# Altium PCB IO BOARD CERES V2.PcbDoc
Units mm, origin at the board's own origin, x right, y up, seen from the top; angles counter-clockwise.
Board outline 85.73 x 76.71 mm, 2 copper layers (Top Layer, Bottom Layer), stack 1.671 mm thick; 60 components, 40 nets, 187 pads, 89 vias.
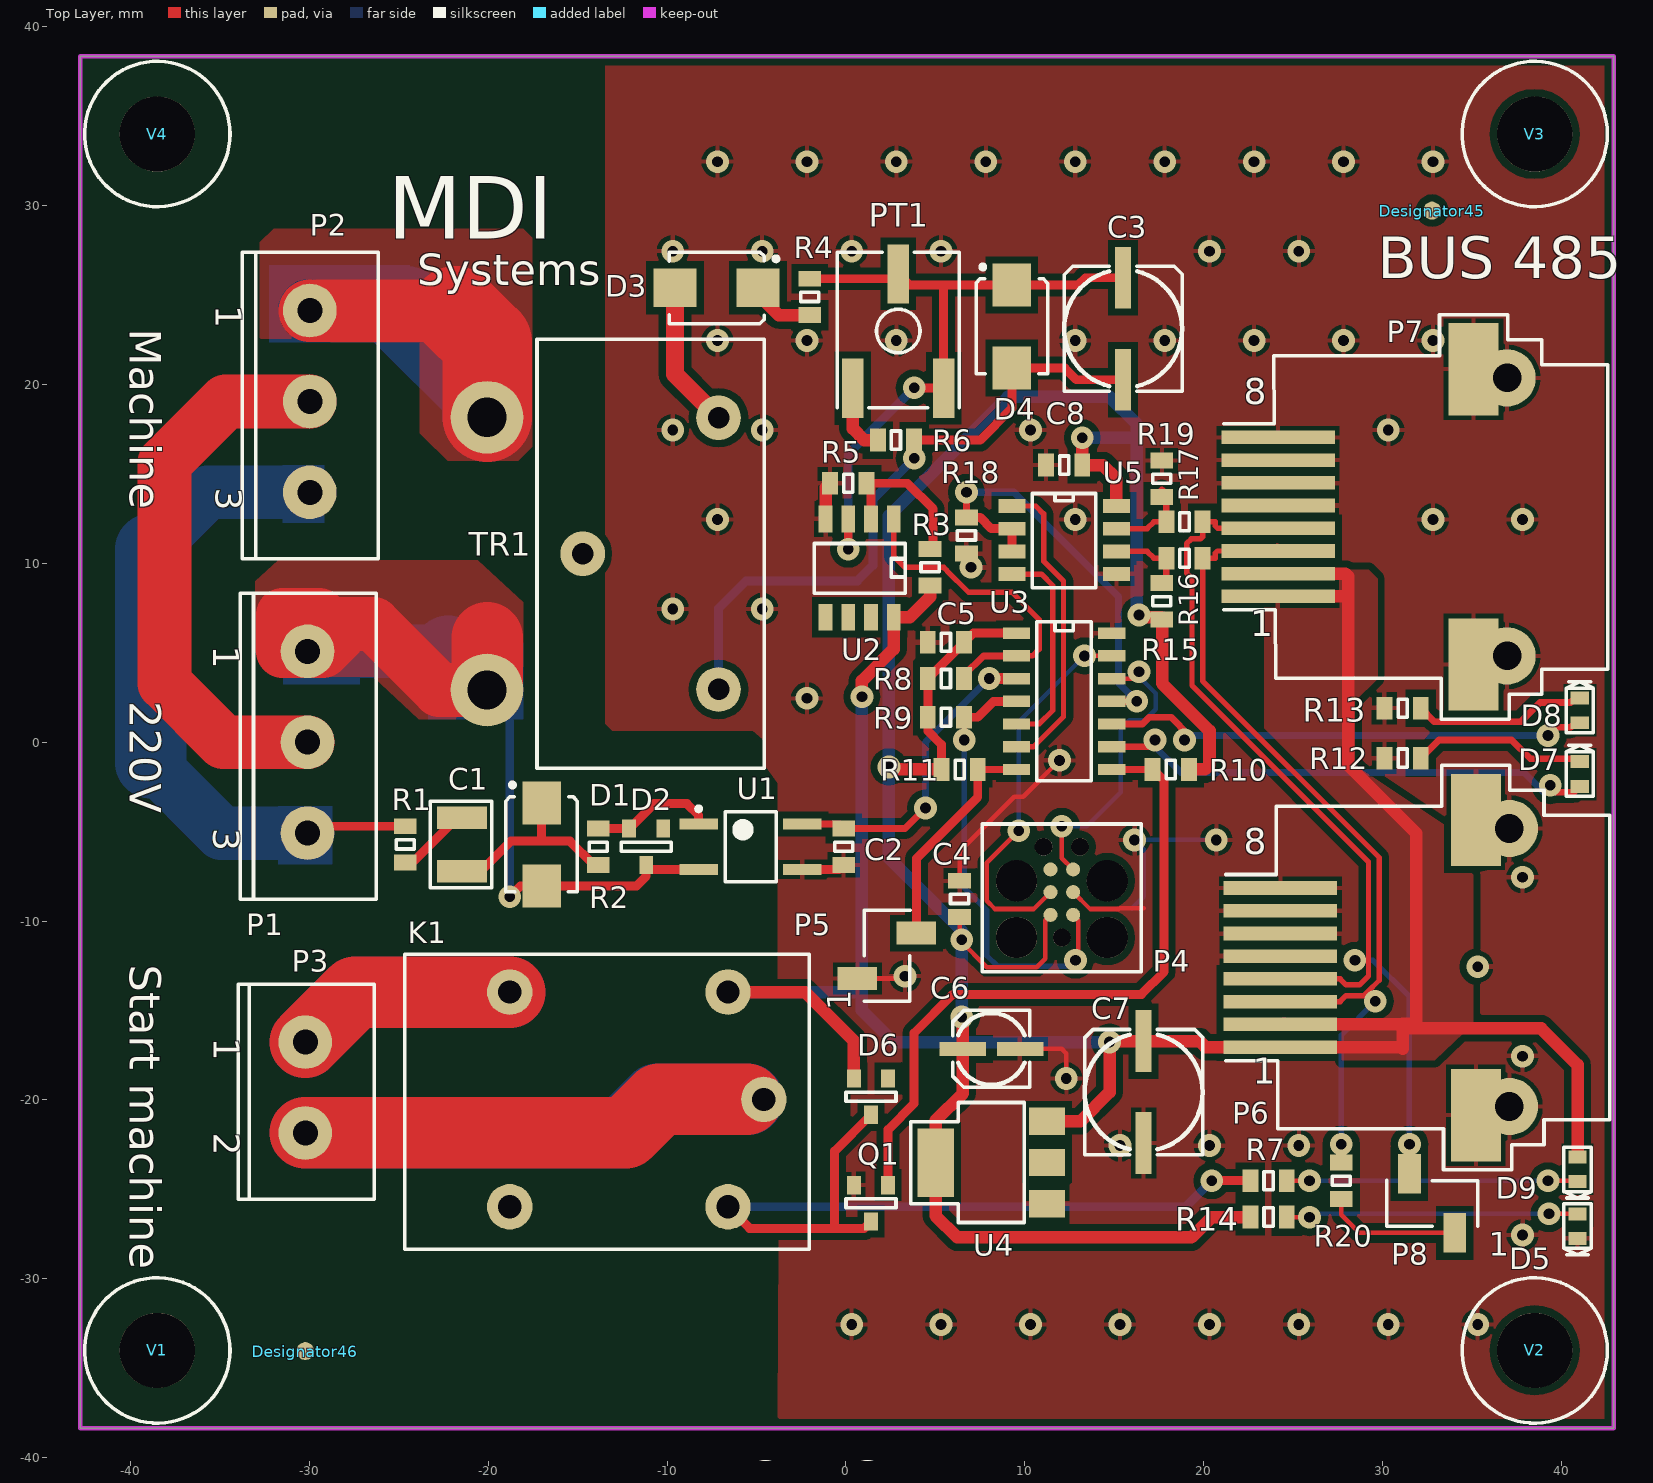
[diagram p0: Top Layer view]
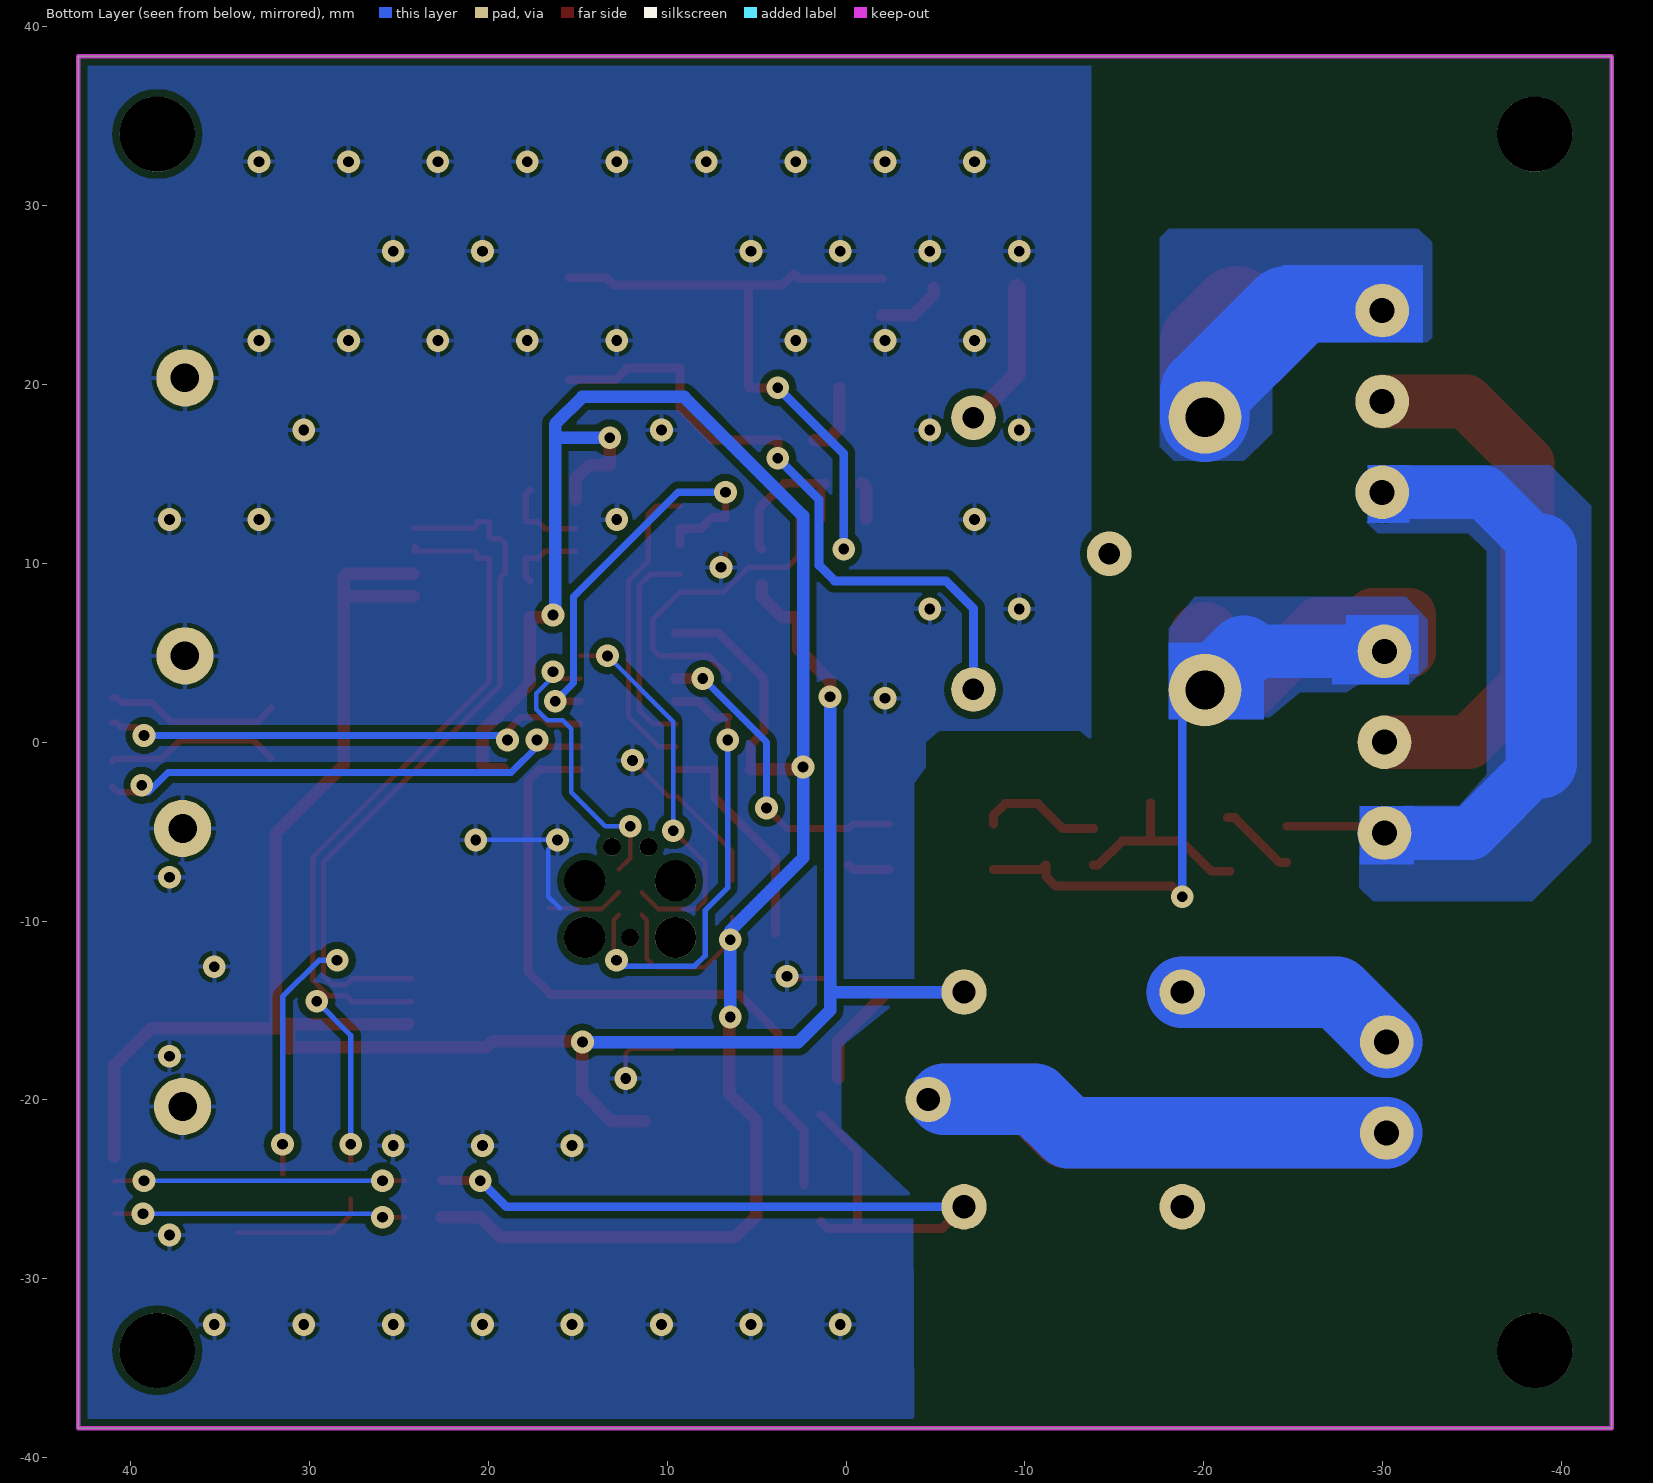
[diagram p1: Bottom Layer view, seen from below]
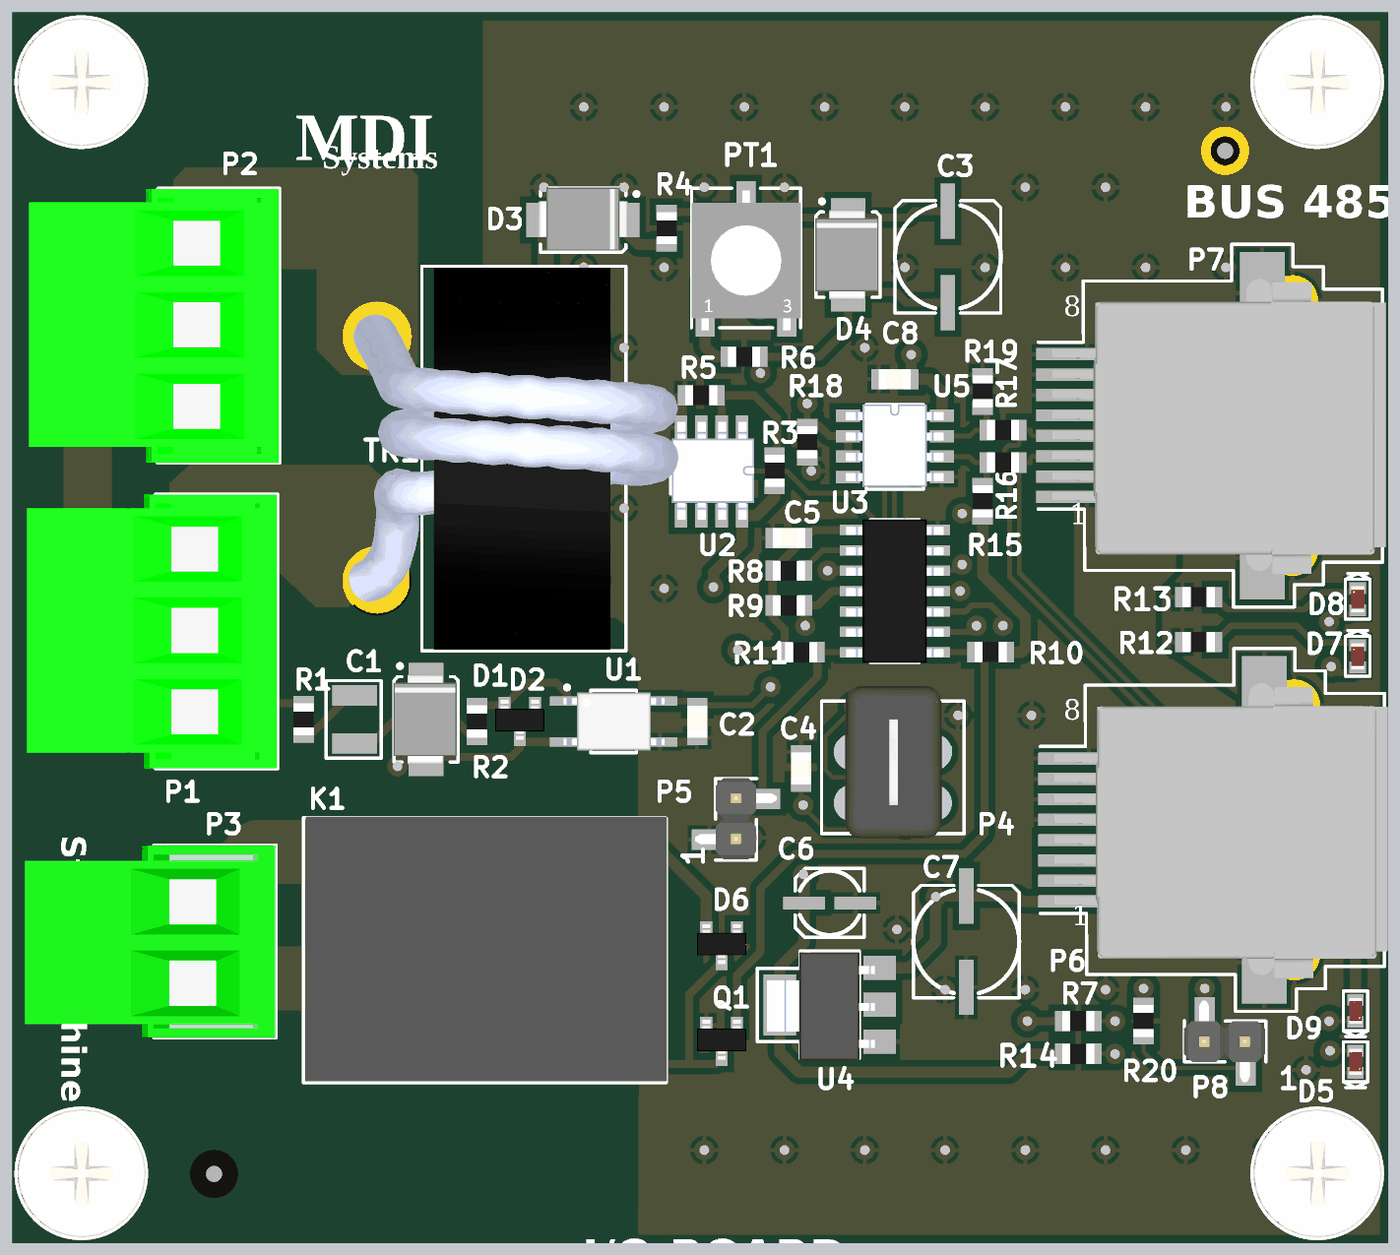
[diagram p2: 3D render of the assembled board from above, using the file's embedded part models]

## Layer stack, top to bottom
Top Solder: solder mask 0.0102, Solder Resist, Dk 3.5
Top Layer: signal copper 0.0356
Dielectric1: core 1.6, FR-4, Dk 4.8
Bottom Layer: signal copper 0.0356
Bottom Solder: solder mask 0.0102, Solder Resist, Dk 3.5

## Board outline
-42.799,-38.354 42.926,-38.354 42.926,38.354 -42.799,38.354

## Design rules (kind name [scope] priority, off if disabled: settings)
Clearance Clearance_2 [InPolygon vs InNet('TERRE')] p1: gap=2
Clearance Clearance_1 [InPolygon] p2: gap=0.4
Clearance [All] p3: gap=0.3
DiffPairsRouting [All] p1: maxlimit=0.9 minlimit=0.254 mostfreqgap=0.3 toplayer_minwidth=0.2 toplayer_maxwidth=2 toplayer_prefwidth=0.3 bottomlayer_minwidth=0.2 bottomlayer_maxwidth=2 bottomlayer_prefwidth=0.3 maxuncoupledlength=12.7
FabricationTestPointUsage TestPointUsage [All] p1: valid=0 allowmultiple=FALSE
FabricationTestpoint Testpoint [All] p1: side=3 testpointundercomponent=TRUE minsize=1.016 maxsize=2.54 preferedsize=1.524 minholesize=0 maxholesize=1.016 preferedholesize=0.813 testpointgrid=0.025 allowsidetop=TRUE allowsidebottom=TRUE usegrid=TRUE gridtolerance=0
HoleSize [All] p1: absolutevalues=TRUE maxlimit=5 minlimit=0.025 maxpercent=80.000 minpercent=20.000
MinimumSolderMaskSliver [All] p1: minsoldermaskwidth=0
PlaneConnect PlaneConnect_1 [(InPolygon AND InNet('NetD1_1') OR InNet('NetP2_1'))] p1: planeconnectstyle=Direct reliefexpansion=0.508 reliefentries=4 reliefconductorwidth=0.254 reliefairgap=0.254
PlaneConnect [All] p2: planeconnectstyle=Relief reliefexpansion=0.508 reliefentries=4 reliefconductorwidth=0.254 reliefairgap=0.254
PolygonConnect [All] p1: connectstyle=Relief reliefconductorwidth=0.254 reliefentries=4 polygonreliefangle="90 Angle" airgapwidth=0.254
RoutingVias [All] p1: holewidth=0.6 width=1.27 viastyle="Through Hole" minholewidth=0.5 minwidth=1.27 maxholewidth=0.9 maxwidth=1.27
SMDNeckDown [All] p1: percent=100.000
SilkToSilkClearance [All] p1: silktosilkclearance=0.1
SilkToSolderMaskClearance SilkscreenOverComponentPads [IsPad] p1: minsilkscreentomaskgap=0.1 clearancetoexposedcopper=TRUE
SolderMaskExpansion [All] p1: expansion=0
Width "Schematic Width Constraint" [InNet('GND')] p1: maxlimit=2 minlimit=0.254 preferedwidth=0.55
Width Width_3 [InNet('+5')] p2: maxlimit=2 minlimit=0.254 preferedwidth=0.7
Width Width_2 [InNet('3.3')] p3: maxlimit=2 minlimit=0.254 preferedwidth=0.7
Width Width_1 [InNet('+12')] p4: maxlimit=2 minlimit=0.254 preferedwidth=0.7
Width [All] p5: maxlimit=6 minlimit=0.254 preferedwidth=0.6
21 further rules are at their usual default settings.

## Classes and differential pairs
component class "U_RS485 IO": C8 P6 P7 P8 R15 R16 R17 R18 R19 R20 U5
component class U_IO: C1 C2 C3 D1 D2 D3 D4 D5 D6 K1 P1 P2 P3 PT1 Q1 R1 R2 R3 R4 R5 R6 R7 TR1 U1 U2
component class "U_MCU IO": C4 C5 C6 C7 D7 D8 D9 P4 P5 R8 R9 R10 R11 R12 R13 R14 U3 U4 V1 V2 V3 V4
differential pair D1: +D1_P -D1_N
differential pair DO: +DO_P -DO_N
differential pair D: +D_P -D_N

## Components (designator, comment, footprint, x,y, rotation, side; value= is the part's Value field where it differs from the comment)
C1 "150nF" C1210 -21.463,-5.715 r270 top
C2 "1uF" C0805 -0.127,-5.842 r270 top
C3 "10uF" Kemet_63 15.494,23.114 r270 top
C4 "100nF" C0805 6.35,-8.763 r270 top
C5 "100nF" C0805 5.588,5.588 r0 top
C6 "10uF" KEMET_4 8.128,-17.145 r0 top
C7 "100uF" Kemet_63 16.637,-19.558 r270 top
C8 "100nF" C0805 12.192,15.494 r180 top
D1 "BZG03C12" DO214AA -17.018,-5.715 r90 top
D2 "BAT54S" SOT23 -11.176,-5.842 r0 top
D3 "1N4007" DO214AA -7.239,25.4 r0 top
D4 "BZG03C12" DO214AA 9.271,23.241 r90 top
D5 "HSMH-C190" 0603-LEDR 40.894,-23.876 r270 top
D6 "BAT54S" SOT23 1.397,-19.812 r0 top
D7 "HSMH-C190" 0603-LEDR 41.021,-1.778 r90 top
D8 "HSMH-C190" 0603-LEDR 41.021,1.778 r90 top
D9 "HSMH-C190" 0603-LEDR 40.894,-27.051 r270 top
Designator45 "Comment" mire 32.766,29.718 r180 top
Designator46 "Comment" mire -30.226,-34.036 r180 top
K1 "RELAY NAISJS" RELAIG5L -4.596,-19.97 r180 top
P1 "IN" CO3P508 -30.099,5.08 r270 top
P2 "OUT" CO3P508 -29.972,24.13 r270 top
P3 "Header 2" CO2P508 -30.226,-16.764 r270 top
P4 "ICSP" TC2030 12.065,-10.922 r90 top
P5 "CLR" M20_1X2 2.286,-11.938 r90 top
P6 "RJ45" AMPHENOL-RJ45_8 30.684,-12.596 r180 top
P7 "RJ45" AMPHENOL-RJ45_8 30.557,12.596 r180 top
P8 "EIA-485 TERMINAISON" M20_1X2 32.766,-25.781 r180 top
PT1 "100K" 3361P 2.921,22.987 r0 top
Q1 "2N7002" SOT23 1.397,-25.781 r0 top
R1 "330" R0805 -24.638,-5.715 r90 top
R2 "1K" R0805 -13.843,-5.842 r90 top
R3 "10K" R0805 4.699,9.779 r270 top
R4 "220" R0805 -2.032,24.892 r270 top
R5 "2.2K" R0805 0.127,14.478 r0 top
R6 "220" R0805 2.794,16.891 r180 top
R7 "1K" R0805 23.622,-24.511 r0 top
R8 "56K" R0805 5.588,3.556 r180 top
R9 "56K" R0805 5.588,1.397 r180 top
R10 "56K" R0805 18.161,-1.524 r0 top
R11 "56K" R0805 6.35,-1.524 r180 top
R12 "220" R0805 31.115,-0.889 r0 top
R13 "220" R0805 31.115,1.905 r0 top
R14 "270" R0805 23.622,-26.543 r180 top
R15 "4.7K" R0805 17.653,7.874 r270 top
R16 "56" R0805 18.923,10.287 r0 top
R17 "56" R0805 18.923,12.319 r0 top
R18 "1K" R0805 6.731,11.557 r90 top
R19 "4.7K" R0805 17.653,14.732 r270 top
R20 "120" R0805 27.686,-24.511 r90 top
TR1 "AC1010" TR-AC10XX -10.922,10.541 r90 top
U1 "HCPL-181" OPTO-4PIN -5.334,-5.842 r0 top
U2 "LM358DMR2" so8 2.667,12.484 r270 top
U3 "PIC16F1824" SO-14 12.192,2.286 r0 top
U4 "LM1117DT-5.0" SOT223 8.128,-23.495 r90 top
U5 "ADM4851ARZ" SOIC8 12.192,11.303 r0 top
V1 "VIS" VIS42 -38.5,-34 r0 top
V2 "VIS" VIS42 38.5,-34 r0 top
V3 "VIS" VIS42 38.5,34 r0 top
V4 "VIS" VIS42 -38.5,34 r0 top

## Footprints (in the part's own frame and the unit in brackets; to place one, negate y for a bottom-side part, rotate by r counter-clockwise, add the part's x,y. Pads: shape width x height; smd on the part's side, far side on the other; paste and mask are expansions set on the pad)
0603-LEDR [mm]
  rect 0.725x1.016 smd paste+0 mask+0: 1(-0.69,0) 2(0.69,0)
  silkscreen extent -1.24,-0.76 1.6,0.76, body extent -0.8,-0.4 0.8,0.4, height 0.69
3361P [mm] "Résistance ajustable Bourns"
  rect 1.2x3.3 smd: 1(-2.54,-3.2) 2(0,3.2) 3(2.54,-3.2)
  silkscreen extent -3.4,-4.3 3.4,4.4, body extent -3.4,-4.45 3.4,4.25, height 4.88
AMPHENOL-RJ45_8 [mm]
  rect 6.35x0.76 smd: 1(6.4,4.445) 2(6.4,3.175) 3(6.4,1.905) 4(6.4,0.635) 5(6.4,-0.635) 6(6.4,-1.905) 7(6.4,-3.175) 8(6.4,-4.445)
  round 3.2 hole 1.6: 9(-6.4,7.77) 9(-6.4,-7.77)
  rect 2.8x5.15 smd: 9(-4.524,8.255) 9(-4.524,-8.255)
  silkscreen extent -12.02,-11.3 9.45,11.3, body extent -12.22,-9.14 8.56,9.23, height 11.89
C0805 [mil]
  rect 35x50 smd: 1(-40,0) 2(40,0)
  silkscreen extent -10,-20 10,20, body extent -39,-25 40,25, height 56
C1210 [mm]
  rect 1.27x2.8 smd paste+0 mask+0: 1(-1.5,0)
  rect 1.27x2.8 smd mask+0: 2(1.5,0)
  silkscreen extent -2.41,-1.78 2.41,1.65, body extent -1.52,-1.27 1.52,1.27, height 1
CO2P508 [mm]
  round 3 hole 1.4: 1(0,0) 2(5.08,0)
  silkscreen extent -3.23,-3.75 8.79,3.86, body extent -3.2,-11.79 8.78,3.86, height 22.32
CO3P508 [mm]
  round 3 hole 1.4: 1(0,0) 2(5.08,0) 3(10.16,0)
  silkscreen extent -3.25,-3.77 13.87,3.84, body extent -3.22,-11.79 13.84,3.86, height 22.32
DO214AA [mm] "Molded Diode, 2-Leads, Body 5,4x3,6mm, IPC Medium Density"
  rect 2.4x2.15 smd: 1(-2.325,0) 2(2.325,0)
  silkscreen extent -2.65,-2 3.45,2, body extent -2.78,-1.9 2.79,2.03, height 2.32
KEMET_4 [mm]
  rect 2.6x0.8 smd: 1(-1.6,0) 2(1.6,0)
  silkscreen extent -2.15,-2.15 2.15,2.15, body extent -2.6,-2.25 2.6,2.25, height 4.6
Kemet_63 [mm]
  rect 3.45x0.9 smd: 1(-2.85,0) 2(2.85,0)
  silkscreen extent -3.5,-3.3 3.5,3.3, body extent -3.5,-3.4 3.5,3.4, height 8.7
M20_1X2 [mm] "Connecteur Harwin_M20-8770242"
  rect 1.27x2.2 smd: 1(-1.27,1.65) 1(-1.27,1.65) 2(1.27,-1.65)
  silkscreen extent -2.54,-1.3 2.54,1.27, body extent -2.5,-2.54 2.58,2.54, height 9.95
mire [mm]
  round 1 smd mask+1: Mire(0,0)
OPTO-4PIN [mm] "SOP, 4-Leads, Body 3,60x4,40mm, Pitch 2,54mm, IPC Medium Density"
  rect 2.15x0.6 smd: 1(-2.9,1.27) 2(-2.9,-1.27) 3(2.9,-1.27) 4(2.9,1.27)
  silkscreen extent -3.02,-1.95 1.42,2.24, body extent -3.13,-1.8 3.17,1.8, height 2.2
R0805 [mil]
  rect 35x50 smd: 1(-40,0) 2(40,0)
  silkscreen extent -10,-20 10,20, body extent -39,-24 39,25, height 20
RELAIG5L [mm]
  round 2.54 hole 1.3: 1(0,0) 2(2,-6) 3(14.2,-6) 4(14.2,6) 5(2,6)
  silkscreen extent -2.54,-8.13 20.07,8.38, body extent -2.57,-8.2 19.93,8.3, height 19
so8 [mil]
  rect 59.1x30.3 smd: 1(0,0) 2(0,-50) 3(0,-100) 4(0,-150) 5(216.5,-150) 6(216.5,-100) 7(216.5,-50) 8(216.5,0)
  silkscreen extent 53,-175 163,26, body extent -13,-172 226,30, height 69
SO-14 [mil]
  rect 60x25 smd: 1(-105,150) 2(-105,100) 3(-105,50) 4(-105,0) 5(-105,-50) 6(-105,-100) 7(-105,-150) 8(105,-150) 9(105,-100) 10(105,-50) 11(105,0) 12(105,50) 13(105,100) 14(105,150)
  silkscreen extent -60,-175 60,175, body extent -120,-176 119,176, height 69
SOIC8 [mil]
  rect 59.1x30.3 smd: 1(-115,75) 2(-115,25) 3(-115,-25) 4(-115,-75) 5(115,-75) 6(115,-25) 7(115,25) 8(115,75)
  silkscreen extent -70,-105 70,102, body extent -120,-100 119,103, height 69
SOT23 [mil]
  rect 30x40 smd: 1(37.5,40) 2(-37.5,40) 3(0,-40)
  silkscreen extent -55,-10 55,10, body extent -60,-45 60,53, height 47
SOT223 [mil]
  rect 60x80 smd: 1(-90.6,-122.5) 2(0,-122.5) 3(90.6,-122.5)
  rect 150x80 smd: 4(-0.6,122.5)
  silkscreen extent -132,-73 132,178, body extent -137,-111 129,154, height 73
TC2030 [mil]
  round 31 smd paste-39.37: 1(50,-25) 2(50,25) 3(100,-25) 4(100,25) 5(150,-25) 6(150,25)
  round 39 hole 39.37 unplated: 7(0,0) 8(200,-40) 9(200,40)
  round 90.55 hole 90.55 unplated: 10(0,-100) 11(125,-100) 12(0,100) 13(125,100)
  silkscreen extent -75,-175 250,175, body extent -87,-120 287,116, height 626
TR-AC10XX [mm]
  round 4.064 hole 2.2 mask+0.127: 2(-7.62,9.144) 2(7.62,9.144)
  round 2.5 hole 1.2 mask+0.127: 3(-7.593,-3.796) 4(7.593,-3.796) 5(0,3.796)
  silkscreen extent -11.99,-6.35 11.99,6.35, body extent -11.91,-9.63 11.89,10.89, height 29.76
VIS42 [mm]
  round 4.199 hole 4.2: 1(0,0)
  silkscreen extent -4.06,-4.06 4.06,4.06, body extent -3.97,-4 4.03,4, height 3.09

## Part data
C1: library part Cap, "Capacitor"
C2: library part "Cap 0805 1uF", "Capacitor"
C3 C7: library part "Cap Pol 100uF", "Polarized Capacitor"
C4 C5 C8: library part "Cap 0805 100nF", "Capacitor"
C6: library part "Cap Pol1", "Polarized Capacitor"
D1 D4: library part DZ
D2 D6: "Schottky Barrier Double Diode"
D3: library part D
D5 D7 D8 D9: "Surface Mount Chip LED, Red"
P1 P2: library part "Header 3", "Header, 3-Pin"
P3: "Header, 2-Pin"
P4: library part "Header 6", "Header, 6-Pin"
P5 P8: library part "Header 2", "Header, 2-Pin"
P6 P7: library part "Header 8", "Header, 8-Pin"
PT1: library part RV
Q1: "N-channel Enhancement Mode Field-effect Transistor"
R1 R2: library part Res2, "Resistor"
R3: library part "Resistor 0805 10K", "Resistor"
R4 R6 R12 R13: library part "Resistor 0805 220", "Resistor"
R5: library part "Resistor 0805 2.2K", "Resistor"
R7 R14 R18: library part "Resistor 0805 1K", "Resistor"
R8 R9 R10 R11: library part "Resistor 0805 56K", "Resistor"
R15 R19: library part "Resistor 0805 4.7K", "Resistor"
R16 R17: library part "Resistor 0805 56", "Resistor"
R20: library part "Resistor 0805 120", "Resistor"
U1: library part Optoisolator1, "4-Pin Phototransistor Optocoupler"
U2: "Single-Supply Dual Operational Amplifier"
U3: library part PIC16(L)F1824, "14 Pin Flash Microcontrollers with XLP Technology"
U4: "800mA Low-Dropout Linear Regulator, 3-pin TO-252"
U5: library part MAX485ESA, "Low-Power, Slew-Rate-Limited RS-485/RS-422 Transceiver"

## Via types
v1: diameter 1.27, hole 0.6, Top Layer to Bottom Layer, 89 vias

## Nets (pads, with @x,y where several pads share a name; then routed paths per layer and width w, separated by ;. In a path a pad name is that pad's centre, name@x,y a point inside that pad or via, vN(x,y) a via of type N, cw(c..) or ccw(c..) an arc to the next point about the centre after c; other vN are vias at no path point)
+5: C4.2 C5.2 C6.1 C8.1 P4.2 R8.2 R9.2 R10.2 R11.2 R14.2 R15.2 U3.1 U4.4 U5.8 | length 131.8
  Top Layer w0.254: v1@6.35,-11.049 C4.2 ; v1@6.413,-11.112 7.874,-12.573 10.668,-12.573 11.138,-12.103 11.138,-9.944 P4.2
  Top Layer w0.5: R11.2 5.334,-0.127 4.572,0.635 R9.2 R8.2 C5.2 7.112,6.096 U3.1
  Top Layer w0.7: v1(2.398,-1.382) 2.54,-1.524 R11.2 ; v1(6.477,-15.367) 6.528,-15.418 C6.1 6.528,-19.634 5.016,-21.145 U4.4 5.016,-26.479 6.223,-27.686 19.304,-27.686 20.447,-26.543 R14.2 ; v1(13.208,17.018) C8.1 14.351,15.494 15.113,14.732 U5.8@15.113,13.589 ; v1(16.383,7.112) 16.51,6.985 17.653,6.985 17.668,6.97 17.668,3.287 20.32,0.635 20.32,-1.27 20.066,-1.524 R10.2
  Bottom Layer w0.7: v1(6.477,-15.367) v1(6.477,-11.049) 6.477,-10.541 2.398,-6.462 v1(2.398,-1.382) 2.398,12.646 9.056,19.304 14.732,19.304 16.256,17.78 16.256,17.018 ; v1(13.208,17.018) 16.256,17.018 ; v1(16.383,7.112) 16.51,7.112 16.256,7.366 16.256,17.018
+12: C7.1 D5.1 D6.2 K1.2 P6.1 P6.2 P7.1 P7.2 R3.2 U2.8 U4.3 | length 140.7
  Top Layer w0.7: K1.2 -2.286,-13.97 0.445,-16.7 D6.2 ; v1(0.889,2.54) 0.889,3.429 2.667,5.207 U2.8 3.556,6.985 4.699,8.128 R3.2 ; U4.3 13.096,-21.194 14.732,-19.558 v1(14.732,-16.764) 14.788,-16.708 C7.1 19.756,-16.708 20.089,-17.041 P6.1 31.011,-17.041 31.115,-17.145 31.115,-16.002 38.862,-16.002 40.894,-18.034 D5.1 ; P7.1 27.836,8.151 28.067,8.382 ; P7.2 27.917,9.421 28.067,9.271 28.067,8.382 ; P6.2@24.485,-15.748 24.5,-15.763 31.1,-15.763 31.115,-15.748 31.877,-15.748 31.877,-5.08 28.067,-1.27 28.067,8.382
  Bottom Layer w0.7: K1.2 0.635,-13.97 0.889,-13.716 ; v1(0.889,2.54) 0.889,-13.716 ; v1(14.732,-16.764) 2.667,-16.764 0.889,-14.986 0.889,-13.716
\M\C\L\R\: P4.1 R9.1 U3.4 | length 25.7
  Top Layer w0.254: P4.1 12.992,-9.944 12.992,-12.154 12.827,-12.319 v1@12.827,-12.065
  Top Layer w0.3: v1(6.604,0.127) R9.1
  Top Layer w0.5: R9.1 7.366,1.397 8.255,2.286 U3.4
  Bottom Layer w0.3: v1(6.604,0.127) 6.604,-8.128 7.874,-9.398 7.874,-11.938 8.458,-12.522 12.624,-12.522 12.827,-12.319 v1(12.827,-12.192)
D1_N: R15.1 R16.1 U5.6 | length 4.3
  Top Layer w0.3: U5.6 16.831,10.668 17.212,10.287 R16.1
  Top Layer w0.381: R15.1@17.653,9.017 17.907,9.271 R16.1
D1_P: R17.1 R19.2 U5.7 | length 4.6
  Top Layer w0.3: U5.7 16.831,11.938 17.212,12.319 R17.1
  Top Layer w0.381: R19.2@17.653,14.097 17.907,13.843 R17.1@17.907,12.573
D_N: P6.3 P7.3 R16.2 R20.2 | length 49
  Top Layer w0.3: P7.3 23.873,10.691 20.768,10.691 20.641,10.564 20.641,10.287 R16.2 19.939,3.429 29.81,-6.442 29.81,-13.307 29.147,-13.97 29.591,-14.414 v1(29.591,-14.478) ; P6.3 27.626,-14.501 27.961,-14.166 28.951,-14.166 29.115,-14.002 ; R20.2 v1(27.686,-22.479)
  Top Layer w0.381: P7.3@23.873,10.691 P7.3@24.104,10.922
  Bottom Layer w0.3: v1(27.686,-22.479) 27.686,-16.383 v1(29.591,-14.478)
D_P: P6.4 P7.4 P8.2 R17.2 | length 54.6
  Top Layer w0.3: P7.4 20.768,11.961 20.641,12.088 20.641,12.319 R17.2 19.939,11.494 19.817,11.372 19.308,11.372 19.045,11.108 19.045,9.466 19.308,9.202 19.339,9.202 19.339,3.18 29.21,-6.691 29.21,-12.192 ; P6.4 27.626,-13.231 27.961,-13.566 28.702,-13.566 29.21,-13.058 29.21,-12.192 ; v1(28.448,-12.192) 29.21,-12.192 ; P8.2 v1(31.496,-22.479)
  Bottom Layer w0.3: v1(28.448,-12.192) 29.464,-12.192 31.496,-14.224 v1(31.496,-22.479)
DO_N: U3.6 U5.1 | length 17.1
  Top Layer w0.3: U5.1 10.608,13.208 11.049,12.767 11.049,10.12 11.776,9.393 12.157,9.012 12.157,1.422 10.481,-0.254 U3.6
DO_P: U3.5 U5.4 | length 11.9
  Top Layer w0.3: U5.4 10.922,9.398 11.557,8.763 11.557,1.778 10.795,1.016 U3.5
GND: C2.2 C4.1 C5.1 C6.2 C7.2 C8.2 D9.2 P4.3 P5.1 P6.5 P6.6 P6.7 P6.8 P6.9 P7.5 P7.6 P7.7 P7.8 P7.9 Q1.2 R5.1 R12.1 R13.1 R18.1 R19.1 U1.3 U2.4 U3.14 U4.1 U5.5 | length 34.9
  Top Layer w0.254: P5.1@0.636,-13.208 3.175,-13.208 v1(3.302,-13.081) ; C4.1 6.35,-6.096 9.398,-3.048 9.906,-3.048 v1(11.938,-1.016) ; R18.1 6.731,10.033 v1(6.985,9.779) ; C6.2 12.065,-17.145 12.319,-17.399 v1(12.319,-18.796) ; P4.3 13.642,-9.324 15.258,-9.324 15.311,-9.271 16.637,-9.271
  Top Layer w0.5: U1.3 -0.381,-7.112 C2.2
  Top Layer w0.7: U2.4 -1.143,14.224 R5.1
  Bottom Layer w0.254: v1@6.812,9.779 v1(6.985,9.779) ; 16.002,-9.271 16.637,-8.636 16.637,-5.969 v1(16.129,-5.461) v1(20.701,-5.461)
  other v1: 0.315,-32.548 5.315,-32.548 10.315,-32.548 15.315,-32.548 20.315,-32.548 25.315,-32.548 30.315,-32.548 35.315,-32.548 37.815,-27.548 15.315,-22.548 20.315,-22.548 25.315,-22.548 37.815,-17.548 35.315,-12.548 37.815,-7.548 -2.185,2.452 -9.685,7.452 -4.685,7.452 -7.185,12.452 12.815,12.452 32.815,12.452 37.815,12.452 -9.685,17.452 -4.685,17.452 10.315,17.452 30.315,17.452 -7.185,22.452 -2.185,22.452 2.815,22.452 12.815,22.452 17.815,22.452 22.815,22.452 27.815,22.452 32.815,22.452 -9.685,27.452 -4.685,27.452 0.315,27.452 5.315,27.452 20.315,27.452 25.315,27.452 -7.185,32.452 -2.185,32.452 2.815,32.452 7.815,32.452 12.815,32.452 17.815,32.452 22.815,32.452 27.815,32.452 32.815,32.452
NetC1_1: C1.1 R1.1 | length 4.3
  Top Layer w0.5: R1.1 -24.257,-6.731 -21.741,-4.215 C1.1@-21.336,-4.215
NetC1_2: C1.2 D1.2 R2.1 | length 11.1
  Top Layer w0.5: C1.2 -20.423,-7.215 -18.732,-5.524 -17.145,-5.524 ; D1.2 -17.018,-5.397 -17.145,-5.524 ; R2.1 -14.097,-6.858 -15.43,-5.524 -17.145,-5.524
NetC2_1: C2.1 U1.4 U3.3 | length 17.7
  Top Layer w0.381: U1.4 -0.381,-4.572 C2.1 3.302,-4.826 v1(4.445,-3.683)
  Top Layer w0.6: v1(8.001,3.556) U3.3
  Bottom Layer w0.381: v1(4.445,-3.683) 4.445,0 v1(8.001,3.556)
NetC3_1: C3.1 D4.2 PT1.2 PT1.3 R4.1 U2.3 | length 37.8
  Top Layer w0.5: R4.1 2.642,25.908 PT1.2 3.542,25.566 5.588,25.566 ; v1(0.127,10.795) U2.3 ; v1(3.81,19.812) 5.436,19.812 PT1.3 5.461,25.439 5.588,25.566 ; C3.1 13.391,25.964 12.993,25.566 D4.2 5.588,25.566
  Bottom Layer w0.5: v1(0.127,10.795) 0.127,16.129 v1(3.81,19.812)
NetC3_2: C3.2 D4.1 R6.1 TR1.3 | length 37.1
  Top Layer w0.5: v1(3.81,15.875) R6.1 7.493,16.891 9.271,18.669 D4.1 12.231,20.916 12.883,20.264 C3.2
  Bottom Layer w0.5: TR1.3 -7.126,7.479 -5.588,9.017 0.635,9.017 1.498,9.88 1.498,13.563 v1(3.81,15.875)
NetD1_1: D1.1 D2.3 P1.1 TR1.2@-20.066,2.921 U1.2 | length 58.1
  Top Layer w0.5: v1(-18.796,-8.636) -18.2,-8.04 D1.1 -11.723,-8.04 -11.176,-7.493 D2.3 -10.922,-7.112 U1.2
  Top Layer w3: TR1.2@-20.066,2.921 -22.733,2.921 -26.416,6.604 -28.956,6.604 ; P1.1@-31.496,5.306 -31.496,5.08 P1.1 -29.266,5.08 -28.349,5.997 -28.956,6.604 ; P1.1@-31.496,5.306 -30.198,6.604 -28.956,6.604 ; P1.1@-31.496,5.306 -31.496,7.112 -29.464,7.112 -28.956,6.604
  Top Layer w4: TR1.2@-20.066,2.921 -20.066,5.842
  Bottom Layer w0.5: v1(-18.796,-8.636) -18.796,1.157
  Bottom Layer w3: P1.1 -22.225,5.08
  Bottom Layer w4: -22.225,5.08 TR1.2@-20.066,2.921
NetD2_2: D2.2 R2.2 U1.1 | length 6.9
  Top Layer w0.5: R2.2 D2.2 -10.731,-3.429 -8.89,-3.429 -8.234,-4.085 U1.1
NetD3_1: D3.1 TR1.4 | length 8.3
  Top Layer w1: D3.1 -9.564,20.572 TR1.4
NetD3_2: D3.2 R4.2 | length 3.7
  Top Layer w0.7: D3.2 -4.914,25.019 -3.771,23.876 R4.2
NetD5_2: D5.2 R7.2 | length 16.3
  Top Layer w0.254: R7.2 v1(25.908,-24.511) ; v1(39.243,-24.511) 40.839,-24.511 D5.2
  Bottom Layer w0.254: v1(25.908,-24.511) v1(39.243,-24.511)
NetD6_3: D6.3 K1.5 Q1.3 R7.1 | length 45.6
  Top Layer w0.5: K1.5 -5.388,-27.178 -0.635,-27.178 ; Q1.3 1.016,-27.178 -0.635,-27.178 ; D6.3 -0.635,-22.86 -0.635,-27.178 ; v1(20.447,-24.511) R7.1
  Bottom Layer w0.5: K1.5 18.988,-25.97 v1(20.447,-24.511)
NetD7_1: D7.1 U3.9 | length 28.8
  Top Layer w0.381: U3.9 16.891,-0.254 17.272,0.127 v1(17.276,0.123) ; v1(39.37,-2.413) 39.37,-2.667 39.243,-2.794 40.695,-2.794 D7.1
  Bottom Layer w0.381: v1(17.276,0.123) 17.272,0.127 17.272,-0.254 18.714,-1.696 37.897,-1.696 38.994,-2.794 39.243,-2.794 39.37,-2.667 v1(39.37,-2.413)
NetD7_2: D7.2 R12.2 | length 9.8
  Top Layer w0.381: R12.2 33.147,0.127 37.211,0.127 38.263,-0.925 40.858,-0.925 D7.2
NetD8_1: D8.1 U3.10 | length 27.1
  Top Layer w0.381: U3.10 16.578,1.016 16.959,1.397 18.161,1.397 19.177,0.381 v1(18.923,0.127) ; 39.696,0.834 40.513,0.834 40.767,1.088 D8.1
  Bottom Layer w0.381: v1(18.923,0.127) 19.177,0.381 v1(39.243,0.381)
NetD8_2: D8.2 R13.2 | length 9.8
  Top Layer w0.381: R13.2 32.893,1.143 37.719,1.143 38.79,2.214 40.513,2.214 40.767,2.468 D8.2
NetD9_1: D9.1 R14.1 | length 16.6
  Top Layer w0.254: R14.1 25.781,-26.543 25.836,-26.488 v1(25.908,-26.56) ; v1(39.298,-26.361) D9.1
  Bottom Layer w0.254: v1(25.908,-26.56) 25.836,-26.488 25.836,-26.361 v1(39.298,-26.361)
NetK1_1: K1.1 P3.2 | length 52.8
  Top Layer w2.5: K1.1@-5.557,-19.97 K1.1
  Top Layer w4: P3.2 -12.319,-21.844 -10.445,-19.97 K1.1@-5.557,-19.97
  Bottom Layer w2.5: K1.1@-5.492,-19.97 K1.1
  Bottom Layer w4: P3.2 -12.446,-21.844 -10.572,-19.97 K1.1@-5.492,-19.97
NetK1_3: K1.3 P3.1 | length 25.2
  Top Layer w4: P3.1 -27.432,-13.97 K1.3
  Bottom Layer w4: P3.1 -27.432,-13.97 K1.3
NetP1_3: P1.3 P2.3 R1.2 | length 38.2
  Top Layer w0.5: P1.3 -29.718,-4.699 R1.2
  Bottom Layer w3: -38.862,-1.143 -34.925,-5.08 P1.3 ; -38.862,10.795 -35.687,13.97 P2.3
  Bottom Layer w4: -38.862,-1.143 -38.862,10.795
NetP2_1: P2.1 TR1.2@-20.066,18.161 | length 28
  Top Layer w3.5: P2.1 -21.844,24.13
  Top Layer w5: -21.844,24.13 -20.066,22.352 TR1.2@-20.066,18.161
  Bottom Layer w3.5: P2.1 -24.638,24.13
  Bottom Layer w5: -24.638,24.13 -20.066,19.558 TR1.2@-20.066,18.161
NetP5_2: P5.2 R11.1 U3.7 | length 12.7
  Top Layer w0.381: R11.1 U3.7
  Top Layer w0.5: P5.2 3.936,-6.503 7.366,-3.073 R11.1
NetP8_1: P8.1 R20.1 | length 7.7
  Top Layer w0.254: R20.1 27.686,-26.416 28.701,-27.431 P8.1@34.036,-27.431
NetPT1_1: PT1.1 R6.2 | length 3.9
  Top Layer w0.7: PT1.1 0.381,17.526 1.016,16.891 R6.2
NetQ1_1: Q1.1 R10.1 U3.8 | length 38.4
  Top Layer w0.381: U3.8 R10.1
  Top Layer w0.5: Q1.1 2.349,-21.653 3.81,-20.193 3.81,-16.256 5.969,-14.097 16.51,-14.097 17.78,-12.827 17.78,-2.159 R10.1
NetR3_1: R3.1 R5.2 U2.2 | length 8.7
  Top Layer w0.5: U2.2 1.397,14.224 R5.2 3.429,14.478 4.868,13.039 4.868,10.964 R3.1
NetR8_1: R8.1 U2.1 U3.2 | length 18.3
  Top Layer w0.3: U2.1 2.667,10.414 3.302,9.779 5.461,9.779 5.646,9.594 5.646,9.584 6.848,8.382 9.271,8.382 10.795,6.858 10.795,5.207 10.414,4.826 U3.2
  Top Layer w0.381: R8.1 6.604,3.751 7.679,4.826 U3.2
NetR18_2: R18.2 U3.11 U5.2 U5.3 | length 23.7
  Top Layer w0.4: R18.2 v1(6.731,13.97) ; U3.11 v1(16.256,2.286)
  Top Layer w0.5: R18.2 7.493,12.573 8.128,11.938 U5.2 U5.3@9.271,11.049
  Bottom Layer w0.4: v1(6.731,13.97) 9.398,13.97 15.24,8.128 15.24,3.302 v1(16.256,2.286)
PGEC1: P4.5 U3.12 | length 17.1
  Top Layer w0.254: v1(12.065,-4.699) 12.065,-6.477 P4.5 ; U3.12 16.383,3.556 v1(16.383,3.937)
  Bottom Layer w0.254: v1(12.065,-4.699) 13.462,-4.699 15.367,-2.794 15.367,0.762 15.829,1.224 16.696,1.224 17.318,1.846 17.318,2.726 16.383,3.661 v1(16.383,3.937)
PGED1: P4.4 U3.13 | length 21.6
  Top Layer w0.254: v1(9.652,-4.953) 7.874,-6.731 7.874,-8.869 8.329,-9.324 10.488,-9.324 P4.4 ; v1(13.335,4.826) U3.13
  Bottom Layer w0.254: v1(9.652,-4.953) 9.652,1.143 v1(13.335,4.826)
TERRE: P1.2 P2.2 | length 31.2
  Top Layer w3: P1.2 -34.798,0 -38.1,3.302 -38.1,15.621 -34.671,19.05 P2.2
pads on no net: D2.1 D6.1 Designator45.Mire Designator46.Mire K1.4 P4.6 P4.7 P4.8 P4.9 P4.10 P4.11 P4.12 P4.13 TR1.5 U2.5 U2.6 U2.7 U4.2 V1.1 V2.1 V3.1 V4.1

## Polygon pours and split planes (outlines as drawn)
NetP1_3 on Bottom Layer "Mid-Layer 1-No Net" (solid, remove dead copper, pour order 16): -39.37,15.494 -41.656,13.208 -41.656,-5.588 -38.354,-8.89 -29.464,-8.89 -28.702,-8.128 -28.702,-4.318 -29.464,-3.556 -34.29,-3.556 -35.814,-1.778 -35.814,10.668 -34.798,11.684 -29.718,11.684 -28.702,12.7 -28.702,14.478 -29.718,15.494
NetP2_1 on Bottom Layer "Mid-Layer 1-No Net" (solid, pour order 13): -31.715,21.59 -32.766,22.606 -32.766,27.94 -31.978,28.702 -31.715,28.702 -18.052,28.702 -17.526,28.194 -17.526,16.764 -17.526,16.51 -18.314,15.748 -21.993,15.748 -22.256,15.748 -23.569,17.018 -23.832,17.272 -23.832,22.352 -32.503,22.352 -32.766,22.606
NetD1_1 on Bottom Layer "Mid-Layer 1-No Net" (solid, remove dead copper, pour order 15): -31.04,2.794 -32.512,4.26 -32.512,6.858 -31.285,8.128 -19.506,8.128 -18.034,6.37 -18.034,1.782 -18.525,1.397 -23.678,1.397 -25.396,2.794
GND on Bottom Layer "Top Layer-No Net1" (solid, remove dead copper, pour order 10): -13.716,-38.354 42.926,-38.354 42.926,38.354 -13.716,38.354
NetD1_1 on Top Layer "Mid-Layer 1-No Net" (solid, remove dead copper, pour order 14): -31.496,3.658 -33.02,5.051 -33.02,8.999 -31.75,10.16 -20.574,10.16 -18.034,7.838 -18.034,1.778 -18.542,1.27 -23.876,1.27 -26.416,3.658
NetP2_1 on Top Layer "Mid-Layer 1-No Net" (solid, pour order 12): -31.715,21.59 -32.766,22.606 -32.766,27.94 -31.978,28.702 -31.715,28.702 -18.052,28.702 -17.526,28.194 -17.526,16.764 -17.526,16.51 -18.314,15.748 -21.993,15.748 -22.256,15.748 -23.569,17.018 -23.832,17.272 -23.832,22.352 -32.503,22.352 -32.766,22.606
+12 on Top Layer "Mid-Layer 1-No Net" (solid, remove dead copper, pour order 9): 30.226,-14.224 30.226,-8.636 23.368,-2.54 23.368,9.652 29.21,9.652 29.718,9.144 29.718,3.556 28.448,2.286 28.448,-1.27 35.081,-5.715 35.052,-15.748 32.912,-17.78 24.735,-17.78 24.735,-15.494 29.029,-15.494
GND on Top Layer "Top Layer-No Net" (solid, remove dead copper, pour order 11): -13.462,-38.354 42.926,-38.354 42.926,38.354 -13.462,38.354

## Keep-outs
Keep-Out Layer:
  the board outline again, w0.254

## Other copper
Top Layer:
  pour cut-out: -42.926,1.016 -42.926,1.27 -13.716,1.29 -13.081,0.635 -5.207,0.635 -4.445,0 -4.445,-1.397 -3.81,-2.286 -3.81,-14.726 -2.599,-14.726 0.254,-17.018 0.254,-21.59 -3.753,-25.369 -3.81,-38.354 -42.799,-38.354
  text "CUIVRE TOP" at 137.735,-173.672 h4
Bottom Layer:
  rectangle net NetP1_3: -31.75,-6.83 -28.702,-3.556
  rectangle net NetP1_3: -31.496,12.241 -29.161,15.494
  rectangle net NetP2_1: -32.258,22.352 -24.384,26.67
  rectangle net NetD1_1: -23.368,1.27 -18.034,5.588
  rectangle net NetD1_1: -31.469,3.221 -27.178,3.81
  rectangle net NetD1_1: -32.004,3.81 -27.94,7.112
  pour cut-out: -42.799,-9.906 -25.908,-9.906 -13.081,0.635 -5.207,0.635 -4.445,0 -4.445,-1.397 -3.81,-2.286 -3.81,-14.726 -2.599,-14.726 0.254,-17.018 0.254,-21.59 -3.753,-25.369 -3.81,-38.354 -42.799,-38.354
  text "CUIVRE BOTTOM" at -93.786,-174.307 h4

## Silkscreen, mask and mechanical layers (free items; w line width, h text height)
Top Overlay:
  text "MDI" at -25.617,26.988 h6
  text "BUS 485" at 29.718,25.146 h4
  text "Systems" at -23.966,24.956 h3
  text "Machine" at -40.64,23.114 h3 r270
  text "220V" at -40.64,2.286 h3 r270
  text "Start machine" at -40.64,-12.446 h3 r270
  text "I/O BOARD" at -7.747,-43.307 h4
  text "PLAN D'EQUIPEMENT TOP" at 137.862,-173.672 h4
Bottom Overlay:
  text "PLAN D'EQUIPEMENT BOTTOM" at -76.768,-174.307 h4
  text ".Layer_Name" at -40.065,-183.197 h2
Top Paste:
  text "PATE A BRASER TOP" at 138.116,-173.926 h4
Bottom Paste:
  text "PATE A BRASER BOTTOM" at -77.022,-174.307 h4
Top Solder:
  text "VERNIS EPARGNE TOP" at 137.862,-173.926 h4
Bottom Solder:
  text "VERNIS EPARGNE BOTTOM" at -80.959,-174.561 h4
Fond de plan Bottom:
  circle w0.127: c-4.812,-148.907 r3
  circle w0.127: c-4.812,-148.907 r2
  lines w0.127: -169.605,-121.983 -164.525,-121.983 ; -169.605,-51.498 -164.525,-51.498 ; -169.605,18.987 -164.525,18.987 ; -147.558,-187.553 -147.558,-177.548 ; -120.329,-192.468 -120.329,-187.388 ; -120.329,84.392 -120.329,89.472 ; -71.053,-192.468 -71.053,-187.388 ; -71.053,84.392 -71.053,89.472 ; -50.56,-177.547 -50.56,-162.553 ; -21.904,-192.468 -21.904,-187.388 ; -21.904,84.392 -21.904,89.472 ; -19.552,-182.29 24.609,-182.29 ; -19.552,-177.533 24.609,-177.533 ; -19.552,-172.787 24.609,-172.787 ; -19.552,-168.043 24.609,-168.043 ; -19.552,-163.704 24.577,-163.705 ; -8.569,-148.907 1.037,-148.907 ; -4.812,-152.575 -4.812,-145.227 ; -4.556,-187.553 -4.556,-163.705 ; 2.099,-148.907 4.512,-148.907 ; 5.528,-148.907 17.801,-148.907 ; 10.439,-187.553 10.439,-163.705 ; 27.245,-192.468 27.245,-187.388 ; 27.245,84.392 27.245,89.472 ; 76.521,-192.468 76.521,-187.388 ; 76.521,84.392 76.521,89.472 ; 125.67,-192.468 125.67,-187.388 ; 125.67,84.392 125.67,89.472 ; 174.819,-192.468 174.819,-187.388 ; 174.819,84.392 174.819,89.472 ; 219.015,-121.983 224.095,-121.983 ; 219.015,-51.498 224.095,-51.498 ; 219.015,18.987 224.095,18.987 ; -169.605,-192.468 224.095,-192.468 224.095,89.472 -169.605,89.472 -169.605,-192.468 ; -164.525,-187.388 219.015,-187.388 219.015,84.392 -164.525,84.392 -164.525,-187.388 ; 7.801,-151.907 7.801,-145.907 14.801,-146.907 14.801,-150.907 7.801,-151.907
  lines w0.5: -164.551,-177.548 -19.552,-177.547 ; -164.551,-162.553 -19.552,-162.553 ; -164.551,-153.811 -19.552,-153.811 24.608,-153.81 ; -79.16,-187.553 -79.16,-177.547 ; -64.55,-177.547 -64.55,-162.553 ; -64.55,-167.555 -19.552,-167.555 ; -64.452,-172.558 -36.558,-172.558 -19.552,-172.558 ; -36.558,-177.547 -36.558,-162.553 ; -19.552,-187.553 -19.552,-133.537 ; -19.552,-163.704 24.324,-163.704 ; -19.552,-158.974 24.324,-158.974 ; -19.552,-144.004 24.608,-144.004 ; -4.556,-163.705 -4.556,-159.024 ; 10.439,-163.705 10.439,-159.015 ; -164.551,-187.553 -164.551,-133.537 24.608,-133.522 24.609,-187.538 -164.551,-187.553
  text "8" at -144.383,86.043 h1.78
  text "7" at -95.361,86.043 h1.78
  text "6" at -45.831,86.043 h1.78
  text "5" at 3.191,86.043 h1.78
  text "4" at 52.467,86.043 h1.78
  text "3" at 101.759,86.043 h1.78
  text "2" at 151.019,86.043 h1.78
  text "1" at 200.058,86.043 h1.78
  text "A" at -166.43,52.057 h1.78
  text "A" at 222.19,52.057 h1.78
  text "B" at -166.43,-18.555 h1.78
  text "B" at 222.19,-18.555 h1.78
  text "C" at -166.43,-89.167 h1.78
  text "C" at 222.19,-89.167 h1.78
  text "ECHELLE : 1" at 22.292,-139.509 h3
  text "MDI" at -88.609,-143.065 h8
  text "Systems" at -90.133,-147.129 h4
  text "MODIFICATIONS" at 10.608,-157.289 h3
  text "Ce document est la propriété de MDI System" at -71.561,-157.416 h3
  text "D" at -166.43,-159.271 h1.78
  text "D" at 222.19,-159.271 h1.78
  text "Il ne peut être reproduit ou communiqué sans son autorisation" at -57.972,-160.972 h3
  text "Visa" at -9.331,-162.115 h3
  text "Date" at 5.528,-162.115 h3
  text "Indice" at 20.641,-162.115 h3
  text "NOM" at -40.573,-166.052 h3
  text "DATE" at -53.536,-166.179 h3
  text "SB" at -10.093,-166.687 h3
  text "09/07/14" at 7.366,-166.878 h3
  text "2" at 18.288,-166.878 h3
  text "DESIGNATION : I/O BOARD" at -66.617,-167.322 h4
  text "Etablie" at -24.317,-170.878 h3
  text "13/09/13" at -53.282,-171.132 h2.5
  text "SB" at -41.725,-171.513 h3
  text "Vérifiée" at -23.809,-175.958 h3
  text "MATIERE :" at -22.929,-180.53 h3
  text "FEUILLE" at -152.079,-180.911 h3
  text "N°" at -80.451,-184.213 h6
  text "1/1" at -154.746,-185.356 h1.3
  text "8" at -144.383,-190.817 h1.78
  text "7" at -95.361,-190.817 h1.78
  text "6" at -45.831,-190.817 h1.78
  text "5" at 3.191,-190.817 h1.78
  text "4" at 52.467,-190.817 h1.78
  text "3" at 101.759,-190.817 h1.78
  text "2" at 151.019,-190.817 h1.78
  text "1" at 200.058,-190.817 h1.78
Fond de plan:
  circle w0.127: c59.301,-148.907 r3
  circle w0.127: c59.301,-148.907 r2
  lines w0.127: -169.605,-121.983 -164.525,-121.983 ; -169.605,-51.498 -164.525,-51.498 ; -169.605,18.987 -164.525,18.987 ; -120.329,-192.468 -120.329,-187.388 ; -120.329,84.392 -120.329,89.472 ; -71.18,-192.468 -71.18,-187.388 ; -71.18,84.392 -71.18,89.472 ; -22.031,-192.468 -22.031,-187.388 ; -22.031,84.392 -22.031,89.472 ; 27.245,-192.468 27.245,-187.388 ; 27.245,84.392 27.245,89.472 ; 29.881,-182.29 74.041,-182.29 ; 29.881,-177.533 74.041,-177.533 ; 29.881,-172.787 74.041,-172.787 ; 29.881,-168.043 74.041,-168.043 ; 29.912,-163.705 74.041,-163.704 ; 36.688,-148.907 48.962,-148.907 ; 44.05,-187.553 44.05,-163.705 ; 49.978,-148.907 52.391,-148.907 ; 53.452,-148.907 63.059,-148.907 ; 59.045,-187.553 59.045,-163.705 ; 59.301,-152.575 59.301,-145.227 ; 76.394,-192.468 76.394,-187.388 ; 76.394,84.392 76.394,89.472 ; 105.049,-177.547 105.049,-162.553 ; 125.543,-192.468 125.543,-187.388 ; 125.543,84.392 125.543,89.472 ; 174.819,-192.468 174.819,-187.388 ; 174.819,84.392 174.819,89.472 ; 202.047,-187.553 202.047,-177.548 ; 219.015,-121.983 224.095,-121.983 ; 219.015,-51.498 224.095,-51.498 ; 219.015,18.987 224.095,18.987 ; -169.605,-192.468 -169.605,89.472 224.095,89.472 224.095,-192.468 -169.605,-192.468 ; -164.525,-187.388 -164.525,84.392 219.015,84.392 219.015,-187.388 -164.525,-187.388 ; 39.688,-150.907 46.688,-151.907 46.688,-145.907 39.688,-146.907 39.688,-150.907
  lines w0.5: 29.882,-153.81 74.041,-153.811 219.04,-153.811 ; 29.882,-144.004 74.041,-144.004 ; 30.165,-163.704 74.041,-163.704 ; 30.165,-158.974 74.041,-158.974 ; 44.05,-163.705 44.05,-159.015 ; 59.045,-163.705 59.045,-159.024 ; 74.041,-187.553 74.041,-133.537 ; 74.041,-177.547 219.04,-177.548 ; 74.041,-172.558 91.047,-172.558 118.941,-172.558 ; 74.041,-167.555 119.04,-167.555 ; 74.041,-162.553 219.04,-162.553 ; 91.047,-177.547 91.047,-162.553 ; 119.04,-177.547 119.04,-162.553 ; 137.84,-187.553 137.84,-177.547 ; 29.881,-187.538 219.04,-187.553 219.04,-133.537 29.881,-133.522 29.881,-187.538
  text "1" at -145.568,86.043 h1.78
  text "2" at -96.53,86.043 h1.78
  text "3" at -47.27,86.043 h1.78
  text "4" at 2.022,86.043 h1.78
  text "5" at 51.298,86.043 h1.78
  text "6" at 100.32,86.043 h1.78
  text "7" at 149.85,86.043 h1.78
  text "8" at 198.872,86.043 h1.78
  text "A" at -167.7,52.057 h1.78
  text "A" at 220.92,52.057 h1.78
  text "B" at -167.7,-18.555 h1.78
  text "B" at 220.92,-18.555 h1.78
  text "C" at -167.7,-89.167 h1.78
  text "C" at 220.92,-89.167 h1.78
  text "ECHELLE : 1" at 32.071,-139.636 h3
  text "MDI" at 133.641,-142.303 h8
  text "Systems" at 135.419,-146.621 h4
  text "MODIFICATIONS" at 43.755,-157.416 h3
  text "Ce document est la propriété de MDI System" at 126.051,-157.416 h3
  text "D" at -167.7,-159.271 h1.78
  text "D" at 220.92,-159.271 h1.78
  text "Il ne peut être reproduit ou communiqué sans son autorisation" at 112.462,-160.972 h3
  text "Indice" at 33.849,-162.115 h3
  text "Date" at 48.962,-162.115 h3
  text "Visa" at 63.821,-162.115 h3
  text "NOM" at 95.063,-166.052 h3
  text "DATE" at 108.026,-166.179 h3
  text "09/07/14" at 46.99,-166.624 h3
  text "2" at 36.068,-166.878 h3
  text "SB" at 64.77,-166.878 h3
  text "DESIGNATION : I/O BOARD" at 121.107,-167.322 h4
  text "Etablie" at 78.807,-170.878 h3
  text "13/09/13" at 107.772,-171.132 h2.5
  text "SB" at 96.215,-171.513 h3
  text "Vérifiée" at 78.299,-175.958 h3
  text "MATIERE :" at 77.419,-180.53 h3
  text "FEUILLE" at 206.569,-180.911 h3
  text "N°" at 140.783,-183.959 h6
  text "1/1" at 209.236,-185.356 h1.3
  text "1" at -145.568,-190.817 h1.78
  text "2" at -96.53,-190.817 h1.78
  text "3" at -47.27,-190.817 h1.78
  text "4" at 2.022,-190.817 h1.78
  text "5" at 51.298,-190.817 h1.78
  text "6" at 100.32,-190.817 h1.78
  text "7" at 149.85,-190.817 h1.78
  text "8" at 198.872,-190.817 h1.78
Drill Drawing:
  lines w0.15: 138.344,34.619 141.464,34.619 141.464,38.12 138.344,38.12 138.344,34.619 ; 144.844,24.119 147.964,24.119 147.964,27.62 144.844,27.62 144.844,24.119 ; 145.344,34.619 145.344,38.12 148.464,38.12 148.464,34.619 145.344,34.619 ; 152.224,53.62 152.224,57.12 155.344,57.12 155.344,53.62 152.224,53.62 ; 152.724,44.119 152.724,47.62 155.844,47.62 155.844,44.119 152.724,44.119 ; 154.224,34.619 157.344,34.619 157.344,38.12 154.224,38.12 154.224,34.619 ; 157.844,24.119 157.844,27.62 160.964,27.62 160.964,24.119 157.844,24.119 ; 161.724,53.62 161.724,57.12 164.844,57.12 164.844,53.62 161.724,53.62 ; 163.224,63.619 166.344,63.619 166.344,67.12 163.224,67.12 163.224,63.619 ; 163.344,34.619 166.464,34.619 166.464,38.12 163.344,38.12 163.344,34.619 ; 165.724,44.119 168.844,44.119 168.844,47.62 165.724,47.62 165.724,44.119 ; 167.224,63.619 167.224,67.12 170.344,67.12 170.344,63.619 167.224,63.619 ; 171.224,63.619 171.224,67.12 174.344,67.12 174.344,63.619 171.224,63.619 ; 171.724,53.62 171.724,57.12 174.844,57.12 174.844,53.62 171.724,53.62 ; 171.844,34.619 174.964,34.619 174.964,38.12 171.844,38.12 171.844,34.619 ; 175.224,63.619 175.224,67.12 178.344,67.12 178.344,63.619 175.224,63.619 ; 179.224,63.619 179.224,67.12 182.344,67.12 182.344,63.619 179.224,63.619 ; 179.844,34.619 182.964,34.619 182.964,38.12 179.844,38.12 179.844,34.619 ; 181.724,53.62 184.844,53.62 184.844,57.12 181.724,57.12 181.724,53.62 ; 185.344,24.119 185.344,27.62 188.464,27.62 188.464,24.119 185.344,24.119 ; 192.344,24.119 195.464,24.119 195.464,27.62 192.344,27.62 192.344,24.119 ; 199.844,24.119 202.964,24.119 202.964,27.62 199.844,27.62 199.844,24.119 ; 206.844,36.12 206.844,39.619 209.964,39.619 209.964,36.12 206.844,36.12 ; 206.844,41.619 206.844,45.119 209.964,45.119 209.964,41.619 206.844,41.619 ; 206.844,47.119 206.844,50.62 209.964,50.62 209.964,47.119 206.844,47.119 ; 206.844,52.62 209.964,52.62 209.964,56.12 206.844,56.12 206.844,52.62
  lines w0.254: -42.799,-38.354 42.926,-38.354 42.926,38.354 -42.799,38.354 -42.799,-38.354
  lines w0.5: 123.704,21.619 123.702,78.535 213.344,78.62 213.344,21.62 124.053,21.62 ; 124.053,32.12 213.344,32.12 ; 124.053,52.119 186.844,52.119 ; 124.053,61.734 213.344,61.734 ; 124.053,69.734 213.344,69.734 ; 146.344,52.119 146.344,61.619 ; 146.344,61.734 146.344,69.734 ; 187.053,32.12 187.053,61.734 187.053,69.734
  text "Spécification du circuit imprimé" at 142.844,74.12 h5
  text "Process de Fabrication : RoHS" at 153.844,71.12 h3
  text "Ep. CI.:" at 192.344,65.12 h3
  text "1,6mm" at 200.344,65.12 h3
  text "Nbre de couches :" at 124.844,64.62 h3
  text "2" at 143.344,64.62 h3
  text "2" at 164.094,64.37 h4
  text "4" at 172.044,64.32 h4
  text "5" at 176.244,64.32 h4
  text "6" at 180.144,64.32 h4
  text "3" at 168.244,64.22 h4
  text "CLASSE :" at 150.844,64.12 h4
  text "X" at 167.844,63.92 h3
  text "Epaiss. cuivre de base" at 153.844,58.62 h3
  text "FINITION :" at 195.844,58.12 h3
  text "MATIERE :" at 127.244,57.62 h3
  text "FR4" at 138.344,57.62 h3
  text "HTg : Tg  140° C" at 127.244,54.92 h3
  text "35µ" at 147.844,54.62 h3
  text "70µ" at 157.344,54.62 h3
  text "105µ" at 166.344,54.62 h3
  text "140µ" at 176.344,54.62 h3
  text "X" at 152.744,53.82 h3
  text "HAL" at 189.344,53.62 h3
  text "X" at 207.344,52.82 h3
  text "Vernis épargne :" at 125.344,49.12 h3
  text "Face Top" at 150.724,49.12 h3
  text "Face Bottom" at 161.724,49.12 h3
  text "NiAu" at 189.344,48.12 h3
  text "X" at 153.144,44.32 h3
  text "X" at 166.244,44.32 h3
  text "NiAu+ Contact" at 189.344,42.12 h3
  text "Couleur :" at 125.344,39.62 h3
  text "Vert" at 137.844,39.62 h3
  text "Noir" at 145.344,39.62 h3
  text "Noir Mat" at 151.844,39.62 h3
  text "Blanc" at 162.844,39.62 h3
  text "Rouge" at 170.344,39.62 h3
  text "Bleu" at 179.344,39.62 h3
  text "Argent" at 189.344,37.12 h3
  text "X" at 138.844,34.82 h3
  text "Sérigraphie :" at 125.344,29.12 h3
  text "Face Top" at 142.844,29.12 h3
  text "Face Bottom" at 153.844,29.12 h3
  text "Couleur :" at 173.344,29.12 h3
  text "Blanc" at 184.344,29.12 h3
  text "Noir" at 191.844,29.12 h3
  text "Jaune" at 198.844,29.12 h3
  text "X" at 145.344,24.32 h3
  text "X" at 185.844,24.32 h3
  text "PLAN DE DETOURAGE ET PERCAGE" at 121.352,-173.926 h4
  text ".Legend" at -92.673,-182.435 h2

## Dimensions
-42.799,38.354 to 42.926,38.354 on Drill Drawing
42.926,38.354 to 42.926,-38.354 on Drill Drawing
-38.5,-34 to 38.5,-34 on Drill Drawing
-38.5,-34 to -38.5,34 on Drill Drawing

## Text inside footprints (layer, text, board x,y; h text height)
P1: Top Overlay "1" at -35.84,5.38 h2.5 r270; Top Overlay "3" at -35.84,-4.82 h2.5 r270; Cablage Top "3" at -35.84,-4.82 h2.5 r270; Cablage Top "1" at -35.84,5.38 h2.5 r270
P2: Top Overlay "3" at -35.713,14.23 h2.5 r270; Top Overlay "1" at -35.713,24.43 h2.5 r270; Cablage Top "1" at -35.713,24.43 h2.5 r270; Cablage Top "3" at -35.713,14.23 h2.5 r270
P3: Top Overlay "1" at -35.814,-16.51 h2.5 r270; Top Overlay "2" at -35.814,-21.844 h2.5 r270; Cablage Top "2" at -35.814,-21.844 h2.5 r270; Cablage Top "1" at -35.814,-16.51 h2.5 r270
P5: Top Overlay "1" at 0.254,-14.986 h1.3 r90; Cablage Top "1" at 0.254,-14.986 h1.3 r90
P6: Top Overlay "8" at 22.225,-6.731 h2.5; Top Overlay "1" at 22.733,-19.558 h2.5; Cablage Top "8" at 22.225,-6.731 h2.5; Cablage Top "1" at 22.733,-19.558 h2.5
P7: Top Overlay "1" at 22.606,5.461 h2.5; Top Overlay "8" at 22.225,18.415 h2.5; Cablage Top "1" at 22.606,5.461 h2.5; Cablage Top "8" at 22.225,18.415 h2.5
P8: Top Overlay "1" at 35.941,-28.702 h1.3; Cablage Top "1" at 35.941,-28.702 h1.3